# Altium PCB LCD-Controller.PcbDoc (part 3 of 3)
Units mm, origin at the board's own origin, x right, y up, seen from the top; angles counter-clockwise.
Board outline 100.3 x 38.1 mm, 4 copper layers (Top Layer, Signal Layer 1, Signal Layer 2, Bottom Layer), stack 0.778 mm thick; 118 components, 92 nets, 506 pads, 174 vias.
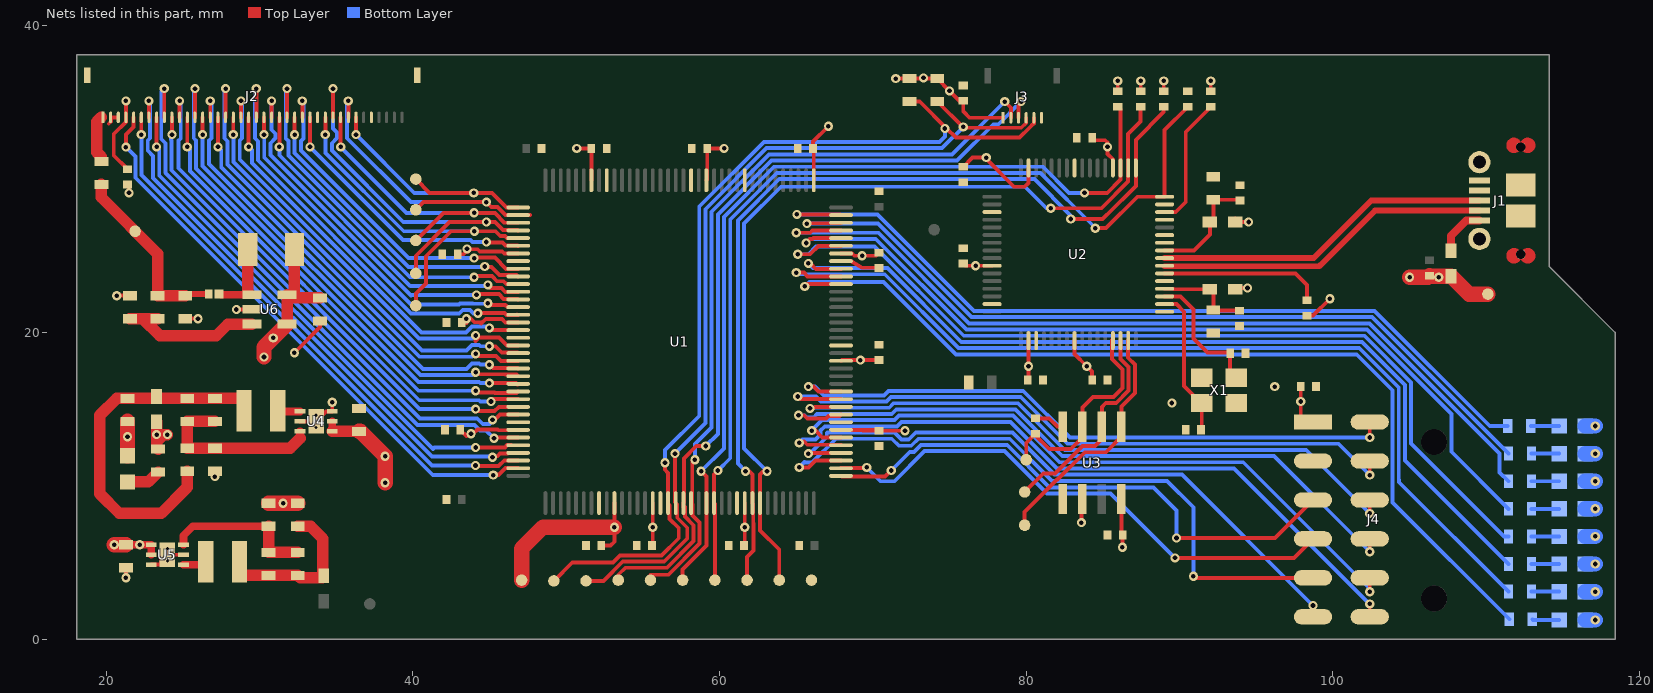
[diagram p4: the nets of this part, all layers, seen from the top]

## Via types
v1: diameter 0.6, hole 0.3, Top Layer to Bottom Layer, 170 vias
v2: diameter 0.5, hole 0.2, Top Layer to Bottom Layer, 4 vias

## Nets (pads, with @x,y where several pads share a name; then routed paths per layer and width w, separated by ;. In a path a pad name is that pad's centre, name@x,y a point inside that pad or via, vN(x,y) a via of type N, cw(c..) or ccw(c..) an arc to the next point about the centre after c; other vN are vias at no path point) (continued)
3V3: 3V3.1 C2.1 C6.1 C7.1 C8.1 C9.1 C10.1 C15.1 C16.1 C21.1 C22.1 C23.1 C24.1 C25.1 C26.1 C27.1 C28.1 C29.1 C30.1 C31.1 C32.1 C41.2 FB2.1 FB3.1 FB4.2 J2.4 J3.1 J4.1 R1.2 R2.2 R3.2 R6.2 R17.2 R18.2 R19.2 U1.7 U1.16 U1.30 U1.37 U1.51 U1.66 U1.79 U1.88 U1.102 U1.118 U1.123 U1.135 U2.20 U2.31 U2.42 U2.50 U2.56 U3.6 U3.8 | length 97.2
  Top Layer w0.25: v1(21.3,35.1) J2.4@21.3,34.025 21.3,33.72 20.5,32.92 20.5,31.55 C15.1@21.4,30.65 ; C30.1@42.927,25.1 43.3,25.1 43.479,25.279 43.616,25.279 43.762,25.425 44.238,25.425 44.384,25.279 45.834,25.279 45.963,25.15 U1.79@46.875,25.15 ; C32.1@43.1,13.65 43.504,13.246 43.758,13.5 43.8,13.458 v1(43.8,13.4) 43.939,13.4 44.214,13.675 45.538,13.675 45.588,13.625 46.85,13.625 U1.102@46.875,13.65 ; C31.1@43.3,20.8 43.5,20.6 v1(43.5,20.9) 43.781,20.9 44.01,20.671 44.366,20.671 44.462,20.575 44.762,20.875 45.809,20.875 46.034,20.65 U1.88@46.875,20.65 ; v1(50.7,32) C29.1@51.65,32 U1.66@51.65,29.925 ; C21.1@52.3,6.1 52.9,6.1 53.15,6.35 v1(53.15,7.3) U1.118@53.15,8.875 ; U1.123@55.65,8.875 v1(55.65,7.3) 55.65,6.15 C22.1@55.7,6.1 ; U1.51@59.15,29.925 59.2,29.975 C28.1@59.2,32 v1(60.3,32) ; C23.1@61.6,6.1 61.65,6.15 v1(61.65,7.3) U1.135@61.65,8.875 ; U1.37@66.15,29.925 66.15,31.95 C27.1@66.1,32 66.1,32.448 v1(67.1,33.448) ; U1.7@67.925,13.65 69.3,13.65 ; U1.16@67.925,18.15 67.975,18.2 v1(69.188,18.2) C25.1@70.4,18.2 ; U1.30@67.925,25.15 68.641,25.15 68.791,25 v1(69.3,25) 70.2,25 C26.1@70.4,25.2 ; C24.1@70.4,13.6 70.35,13.65 69.3,13.65 ; v1@71.45,36.6 v1(71.5,36.55) R18.2@72.4,36.55 R17.2@74.203,36.55 v1(75,35.753) 75.653,35.1 C16.1@75.9,35.1 75.9,34.4 76.3,34 J3.1@78.5,34 ; v1(72.1,13.594) 69.356,13.594 69.3,13.65 ; C8.1@75.9,24.5 76.05,24.35 v1(76.7,24.35) U2.42@77.775,24.35 ; C7.1@75.9,30.8 76.5,31.4 v1(77.4,31.4) 77.4,31.3 79.2,29.5 79.9,29.5 80.15,29.75 U2.31@80.15,30.725 ; C9.1@80.1,16.9 80.15,16.95 v1(80.15,17.8) U2.50@80.15,19.475 ; U2.56@83.15,19.475 83.15,18.6 v1(83.95,17.8) 84.3,17.45 C10.1@84.3,16.9 ; v1(83.6,7.6) 83.6,9.138 U3.6@83.665,9.138 ; C6.1@84.3,32.7 84.464,32.536 85.157,32.536 85.3,32.393 v1(85.3,32.1) 85.3,31.641 85.65,31.291 U2.20@85.65,30.725 ; R3.2@85.965,35.719 v1(85.965,36.4) ; U3.8@86.205,9.138 86.205,6.895 C2.1@86.3,6.8 86.274,6.8 v1(86.274,6) ; R2.2@87.465,35.719 v1(87.465,36.4) ; R1.2@88.965,35.719 v1(88.965,36.4) ; R6.2@92.038,35.719 v1(92.038,36.4) ; FB2.1@93.625,22.82 93.705,22.9 v1(94.43,22.9) v1@94.5,22.9 ; FB3.1@93.625,27.2 93.625,27.425 93.85,27.2 v1(94.5,27.2) ; C41.2@97.9,16.47 97.9,14.16 J4.1@98.7,14.16
  Top Layer w0.75: FB4.2@23.3,14.175 v1(23.3,13.337) 23.3,12.9 ; R19.2@23.4,12.4 23.3,12.5 23.3,12.9 ; v1(24.004,13.337) 23.737,13.337 23.3,12.9
  Top Layer w1: 3V3.1@47.1,3.85 47.1,5.9 48.5,7.3 v1(53.15,7.3)
  other v1: 97.9,15.5 43.54,25.451 73.3,36.6
5V_USB: 5V.1 C1.1 C34.1 C37.1 C40.1 FB1.2 L3.1 U4.4 U4.5 U5.4 U5.5 U6.4 U6.5 | length 24.7
  Top Layer w0.25: FB1.2@107.675,23.7 FB1.2@107.7,23.675
  Top Layer w0.5: C37.1@21.3,6.16 v1(22.2,6.16) U5.4@22.95,6.16 U5.5@22.95,5.51 ; U4.4@34.75,13.55 U4.5@34.75,14.2
  Top Layer w0.75: U6.4@31.805,20.55 U6.5@31.805,22.45 ; U6.5@32.087,22.25 32.287,22.45 L3.1@32.287,25.4 ; U6.5@32.287,22.25 C40.1@33.962,22.25 ; U4.4@34.75,13.55 C34.1@36.4,13.55
  Top Layer w1: v1(20.54,6.16) C37.1@21.3,6.16 ; v1(30.3,18.4) 30.3,19.045 v1(30.9,19.645) U6.4@31.805,20.55 ; C34.1@36.5,13.55 36.581,13.55 v1(38.2,11.931) v1(38.2,10.2) ; v1(105,23.6) 106.2,23.6 C1.1@106.3,23.7 106.325,23.675 FB1.2@107.7,23.675 108.875,22.5 5V.1@110.1,22.5
  other v1: 106.9,23.6
16V: 16V.1 C39.1 D1.1 R8.2 R25.2 | length 12
  Top Layer w0.4: C39.1@25.262,22.5 D1.1@26.697,22.5
  Top Layer w0.75: R8.2@19.7,29.65 19.7,28.8 23.362,25.138 R25.2@23.362,22.4 C39.1@25.162,22.4
B0: J2.21 U1.87 | length 28.1
  Top Layer w0.15: U1.87@46.8,21.225 U1.87@46.875,21.15
  Top Layer w0.254: J2.21@29.8,34.025 v1(29.8,35.9) ; v1(44.248,21.246) v1@44.248,21.289 ; v1@44.27,21.267 44.27,21.277 45.976,21.277 46.103,21.15 U1.87@46.875,21.15
  Bottom Layer w0.254: v1(29.8,35.9) 29.723,35.823 29.723,32.661 29.915,32.469 29.915,31.228 39.897,21.246 43.03,21.246 43.261,21.477 43.739,21.477 43.97,21.246 v1(44.248,21.246)
B1: J2.22 U1.86 | length 23
  Top Layer w0.254: v1(30.3,32.9) J2.22@30.3,34.025 ; v1@45.118,21.781 46.025,21.781 46.058,21.748 46.076,21.748 46.174,21.65 U1.86@46.875,21.65
  Bottom Layer w0.254: v1(30.3,32.9) 30.319,32.881 30.319,31.396 39.892,21.823 43.036,21.823 43.094,21.881 43.906,21.881 43.918,21.869 44.869,21.869 v1(44.9,21.9)
B2: J2.23 U1.85 | length 25.3
  Top Layer w0.254: J2.23@30.8,34.025 v1(30.8,35.1) ; v1(44.157,22.446) 44.033,22.446 43.983,22.496 45.613,22.496 45.924,22.185 46.84,22.185 U1.85@46.875,22.15
  Bottom Layer w0.254: v1(30.8,35.1) 30.8,33.216 31.061,32.955 31.061,32.677 30.723,32.339 30.723,31.563 39.886,22.4 39.932,22.446 v1(44.157,22.446)
B3: J2.24 U1.84 | length 21.8
  Top Layer w0.254: v1(31.3,32.1) J2.24@31.3,34.025 ; v1(44.9,23.1) 44.9,23.073 45.073,22.9 45.78,22.9 46.03,22.65 U1.84@46.875,22.65
  Bottom Layer w0.254: v1(31.3,32.1) 31.3,31.557 39.834,23.023 44.239,23.023 44.293,23.023 44.823,23.023 v1(44.9,23.1)
B4: J2.25 U1.83 | length 24.9
  Top Layer w0.254: J2.25@31.8,34.025 v1(31.8,35.9) ; v1(44,23.6) 44,23.654 44.023,23.677 45.165,23.677 45.5,23.342 45.909,23.342 46.101,23.15 U1.83@46.875,23.15 U1.83@46.856,23.169
  Bottom Layer w0.254: v1(31.8,35.9) 31.723,35.823 31.723,32.646 31.896,32.473 31.896,31.533 39.829,23.6 v1(44,23.6)
B5: J2.26 U1.82 | length 20.2
  Top Layer w0.254: v1(32.3,32.885) J2.26@32.3,34.025 ; v1(44.7,24.3) 44.8,24.2 v1@44.9,24.3 ; v1@44.978,24.269 45.144,24.269 45.667,23.746 46.779,23.746 U1.82@46.875,23.65
  Bottom Layer w0.254: v1(32.3,32.885) 32.3,31.7 39.727,24.273 44.673,24.273 v1(44.7,24.3)
B6: J2.27 U1.81 | length 21.8
  Top Layer w0.254: J2.27@32.8,34.025 v1(32.8,35.1) ; v1(44,24.85) 44.027,24.877 45.362,24.877 46.089,24.15 U1.81@46.875,24.15
  Bottom Layer w0.254: v1(32.8,35.1) 32.877,35.023 32.877,32.646 32.723,32.492 32.723,31.861 39.734,24.85 v1(44,24.85)
B7: J2.28 U1.78 | length 18.2
  Top Layer w0.254: v1(33.3,32.1) J2.28@33.3,34.025 ; v1(44.8,25.9) 44.823,25.877 45.858,25.877 46.054,25.681 46.844,25.681 U1.78@46.875,25.65
  Bottom Layer w0.254: v1(33.3,32.1) 39.372,26.028 43.779,26.028 43.907,25.9 v1(44.8,25.9)
EECLK: EECLK.1 U2.62 U3.2 | length 14.2
  Top Layer w0.254: EECLK.1@79.9,9.6 81.109,10.809 81.882,10.809 83.667,12.595 84.488,12.595 84.935,13.042 U3.2@84.935,13.862 84.935,15.15 85.185,15.4 85.871,15.4 86.678,16.207 86.678,17.75 86.15,18.279 U2.62@86.15,19.475
EECS: EECS.1 U2.63 U3.1 | length 16
  Top Layer w0.254: EECS.1@79.9,7.431 79.9,8.305 82.001,10.405 82.05,10.405 83.835,12.191 85.191,12.191 86.205,13.205 U3.1@86.205,13.862 86.205,15.162 87.082,16.04 87.082,17.918 86.65,18.35 U2.63@86.65,19.475
EEDATA: EEDATA.1 R5.1 U2.61 U3.3 | length 14.3
  Top Layer w0.254: EEDATA.1@80,11.7 80,12.8 R5.1@80.55,13.35 ; R5.1@80.6,13.4 R5.1@80.55,13.35 ; U2.61@85.6,19.496 85.6,18.257 86.185,17.673 86.274,17.583 86.274,16.374 85.704,15.804 84.354,15.804 83.665,15.115 U3.3@83.665,13.862 83.665,13.164 82.901,12.4 81.5,12.4 R5.1@80.55,13.35
G0: J2.13 U1.97 | length 34.3
  Top Layer w0.254: J2.13@25.8,34.025 v1(25.8,35.9) ; v1(44.1,16.2) 44.223,16.077 45.339,16.077 45.362,16.054 46.779,16.054 U1.97@46.875,16.15
  Bottom Layer w0.254: v1(25.8,35.9) 25.723,35.823 25.723,32.661 25.876,32.508 25.876,32.34 25.877,32.339 25.877,30.696 40.373,16.2 v1(44.1,16.2)
G1: J2.14 U1.96 | length 29.7
  Top Layer w0.254: v1(26.3,32.9) J2.14@26.3,34.025 ; v1(45,16.7) 46.725,16.7 46.825,16.6 U1.96@46.875,16.65
  Bottom Layer w0.254: v1(26.3,32.9) 26.28,32.88 26.28,32.507 26.281,32.506 26.281,30.863 40.367,16.777 44.339,16.777 44.416,16.7 v1(45,16.7)
G2: J2.15 U1.95 | length 31.3
  Top Layer w0.254: J2.15@26.8,34.025 v1(26.8,35.1) ; v1(44.1,17.4) 44.223,17.277 46.03,17.277 46.058,17.248 46.706,17.248 46.708,17.246 46.779,17.246 U1.95@46.875,17.15
  Bottom Layer w0.254: v1(26.8,35.1) 26.877,35.023 26.877,32.661 26.723,32.507 26.723,30.992 40.496,17.219 43.881,17.219 44.062,17.4 v1(44.1,17.4)
G3: J2.16 U1.94 | length 28.4
  Top Layer w0.254: v1(27.3,32.1) J2.16@27.3,34.025 ; v1@45,17.9 45.219,17.681 46.844,17.681 U1.94@46.875,17.65
  Bottom Layer w0.254: v1(27.3,32.1) 27.511,31.889 27.511,30.776 40.664,17.623 43.507,17.623 43.861,17.977 44.339,17.977 44.416,17.9 v1(45,17.9)
G4: J2.17 U1.93 | length 31.4
  Top Layer w0.254: J2.17@27.8,34.025 v1(27.8,35.9) ; v1(44.1,18.6) 44.223,18.477 45.439,18.477 45.766,18.15 U1.93@46.875,18.15
  Bottom Layer w0.254: v1(27.8,35.9) 27.723,35.823 27.723,32.661 27.915,32.469 27.915,30.943 40.439,18.419 43.881,18.419 44.062,18.6 v1(44.1,18.6)
G5: J2.18 U1.92 | length 26.9
  Top Layer w0.254: v1(28.3,32.9) J2.18@28.3,34.025 ; v1(45,19.1) 45.387,19.1 45.806,18.681 46.844,18.681 U1.92@46.875,18.65
  Bottom Layer w0.254: v1(28.3,32.9) 28.319,32.881 28.319,31.11 40.606,18.823 43.507,18.823 43.861,19.177 44.339,19.177 44.416,19.1 v1(45,19.1)
G6: J2.19 U1.91 | length 28.8
  Top Layer w0.254: J2.19@28.8,34.025 v1(28.8,35.1) ; v1@44.2,19.55 44.1,19.45 v1(44.1,19.8) 44.223,19.677 45.63,19.677 46.156,19.15 U1.91@46.875,19.15
  Bottom Layer w0.254: v1(28.8,35.1) 28.877,35.023 28.877,32.661 28.723,32.507 28.723,31.278 40.407,19.594 43.906,19.594 44.1,19.788 v1(44.1,19.8)
G7: J2.20 U1.89 | length 25.2
  Top Layer w0.254: v1(29.3,32.1) J2.20@29.3,34.025 ; v1(45,20.3) 45.15,20.15 U1.89@46.875,20.15
  Bottom Layer w0.254: v1(29.3,32.1) 29.511,31.889 29.511,31.061 40.574,19.998 43.482,19.998 43.861,20.377 44.923,20.377 v1(45,20.3)
GND: C2.2 C3.2 C4.2 C5.2 C6.2 C7.2 C8.2 C9.2 C10.2 C11.2 C12.2 C13.2 C14.2 C15.2 C16.2 C17.2 C18.2 C19.2 C20.2 C21.2 C22.2 C23.2 C24.2 C25.2 C26.2 C27.2 C28.2 C29.2 C30.2 C31.2 C32.2 C34.2 C35.2 C37.2 C38.2 C39.2 C40.2 C41.1 DS1.2 DS2.2 DS3.2 DS4.2 DS5.2 DS6.2 DS7.2 DS8.2 DS9.2 GND.1 J1.4 J1.5 J1.6 J1.7 J1.8 J1.9 J1.10 J1.11 J2.2 J2.3 J2.7@40.294,36.768 J2.8@18.781,36.768 J2.29 J2.36 J3.6 J4.2 R4.1 R7.1 R22.1 R24.1 R26.1 U1.8 U1.18 U1.29 U1.46 U1.53 U1.64 U1.80 U1.90 U1.101 U1.116 U1.124 U1.134 U2.1 U2.5 U2.10 U2.11 U2.13 U2.15 U2.25 U2.35 U2.47 U2.51 U3.5 U4.2 U4.6 U4.7 U5.2 U5.6 U5.7 U6.2 X1.2 X1.4 | length 27.3
  Top Layer w0.25: 20.175,33.606 20.325,33.756 20.325,34.025 J2.3@20.8,34.025 ; v1(20.7,22.4) R26.1@21.562,22.4 ; v1(21.3,4) C37.2@21.3,4.66 ; C15.2@21.4,29.65 21.5,29.55 v1(21.5,29.1) ; U5.6@22.95,4.86 23.575,4.86 23.575,5.51 U5.7@24,5.51 U5.2@25.05,5.51 ; C39.2@25.162,20.9 v1(26,20.9) ; v1(28.5,21.5) U6.2@29.519,21.5 ; v1(32.287,18.681) 33.962,20.356 C40.2@33.962,20.75 ; U4.2@32.65,14.2 U4.7@33.7,14.2 34.35,14.85 U4.6@34.75,14.85 v1(34.75,15.45) ; U1.29@67.925,24.65 68.597,24.65 69.3,24.224 C26.2@70.4,24.2 ; R7.1@98.3,21.1 98.7,21.1 v1(99.8,22.2)
  Top Layer w1: DS9.2@21.4,11.953 C35.2@21.4,14.2 ; R24.1@30.6,8.86 v1(31.55,8.86) C38.2@32.5,8.86
  Bottom Layer w1: DS8.2@116.45,1.254 v1(117.1,1.254) ; DS7.2@116.45,3.1 v1(117.1,3.1) ; DS6.2@116.45,4.9 v1(117.1,4.9) ; DS5.2@116.45,6.7 v1(117.1,6.7) ; DS4.2@116.45,8.5 v1(117.1,8.5) ; DS3.2@116.45,10.3 v1(117.1,10.3) ; DS2.2@116.45,12.1 v1(117.1,12.1) ; DS1.2@116.45,13.9 v1(117.1,13.9)
  other v1: 27.1,10.6 21.4,13.2 89.5,15.4 96.2,16.473
  other v2: 24,5.11 24,5.91 33.7,13.8 33.7,14.6
HSYNC: HSYNC.1 J2.32 U1.75 | length 20.1
  Top Layer w0.254: v1(35.3,32.1) J2.32@35.3,34.025 ; HSYNC.1@40.2,26 42,27.8 v1(44,27.8) 44.023,27.777 45.353,27.777 45.98,27.15 U1.75@46.875,27.15
  Bottom Layer w0.254: v1(35.3,32.1) 39.6,27.8 v1(44,27.8)
I2C_SCL: J3.4 R17.1 SCL.1 U1.126 | length 56.4
  Top Layer w0.254: SCL.1@51.3,3.8 52.428,3.8 53.692,5.064 56.399,5.064 57.9,6.565 57.9,7.264 57.246,7.918 57.246,8.779 U1.126@57.15,8.875 57.096,8.929 57.096,11.388 57.1,11.392 v1(57.1,12.1) ; R17.1@74.203,35.05 75.9,33.353 v1(75.9,33.4) 75.952,33.348 79.678,33.348 80,33.67 J3.4@80,34
  Bottom Layer w0.254: v1(57.1,12.1) 59.084,14.084 59.084,28.037 63.063,32.016 74.516,32.016 v1(75.9,33.4)
I2C_SDA: J3.5 R18.1 SDA.1 U1.125 | length 60.6
  Top Layer w0.254: SDA.1@49.2,3.8 50.4,5 53.057,5 53.525,5.468 56.232,5.468 57.346,6.582 57.346,7.246 56.748,7.844 56.748,8.706 56.692,8.762 56.692,8.833 U1.125@56.65,8.875 56.65,10.842 56.446,11.046 v1(56.446,11.5) ; R18.1@72.4,35.05 73.061,35.05 v1@74.811,33.3 ; v1(74.7,33.3) v1@74.811,33.3 ; J3.5@80.5,34 80.5,33.633 80.384,33.517 80.384,33.511 79.837,32.964 79.831,32.964 79.567,32.7 75.411,32.7 v1@74.811,33.3
  Bottom Layer w0.254: v1(56.446,11.5) 56.446,12.33 58.68,14.564 58.68,28.204 62.896,32.42 74.349,32.42 74.7,32.771 v1(74.7,33.3)
LCD_CLK: DCLK.1 J2.30 U1.77 | length 24.5
  Top Layer w0.254: v1(34.3,32.9) J2.30@34.3,34.025 ; DCLK.1@40.2,21.748 40.2,22.546 40.852,23.198 40.852,24.967 42.485,26.6 v1(44.023,26.6) 45.387,26.6 45.706,26.281 46.026,26.281 46.156,26.15 U1.77@46.875,26.15
  Bottom Layer w0.254: v1(34.3,32.9) 34.3,31.713 39.413,26.6 v1(44.023,26.6)
LCD_DE: DDE.1 J2.34 U1.73 | length 17.8
  Top Layer w0.254: v1(36.3,32.9) J2.34@36.3,34.025 ; DDE.1@40.2,30 41.1,29.1 v1(43.979,29.1) 45.173,29.1 46.123,28.15 U1.73@46.875,28.15
  Bottom Layer w0.254: v1(36.3,32.9) 40.1,29.1 v1(43.979,29.1)
LCD_DISP: DISP.1 J2.31 U1.76 | length 27.1
  Top Layer w0.254: J2.31@34.8,34.025 v1(34.8,35.9) ; DISP.1@40.2,23.85 40.2,25 42.4,27.2 v1(44.8,27.2) 45.359,27.2 45.874,26.685 46.84,26.685 U1.76@46.875,26.65
  Bottom Layer w0.254: v1(34.8,35.9) 34.8,33.3 35.061,33.039 35.061,32.677 34.723,32.339 34.723,31.861 39.384,27.2 v1(44.8,27.2)
LCD_INT: DINT.1 J3.3 U1.127 | length 52.7
  Top Layer w0.254: DINT.1@53.4,4.2 53.86,4.66 56.567,4.66 58.304,6.397 58.304,7.431 57.748,7.987 57.748,8.63 57.747,8.631 57.65,8.631 U1.127@57.65,8.875 57.677,8.902 57.677,11.793 58.484,12.6 v1(59.1,12.6) ; J3.3@79.5,34 79.5,34.883 v1(79.667,35.05)
  Bottom Layer w0.254: v1(59.1,12.6) 59.892,13.392 59.892,27.702 63.398,31.208 75.492,31.208 77.861,33.577 78.194,33.577 v1(79.667,35.05)
LCD_RST: DRST.1 J3.2 U1.128 | length 49.8
  Top Layer w0.254: DRST.1@55.5,4.2 56.678,4.2 58.708,6.23 58.708,7.598 58.248,8.058 58.248,8.777 U1.128@58.15,8.875 58.223,8.948 58.223,11.623 58.3,11.7 v1(58.4,11.7) ; v1(78.6,35.05) 79,34.65 J3.2@79,34
  Bottom Layer w0.254: v1(58.4,11.7) 58.4,12.716 59.488,13.804 59.488,27.869 63.231,31.612 75.162,31.612 v1(78.6,35.05)
NetC3_1: C3.1 U2.2 X1.1 | length 9.7
  Top Layer w0.254: U2.2@89.025,21.85 89.8,21.85 90.3,21.35 90.3,16.508 91.408,15.4 X1.1@91.444,15.4 91.444,13.694 C3.1@91.4,13.65
NetC4_1: C4.1 U2.3 X1.3 | length 8.9
  Top Layer w0.254: U2.3@89.025,22.35 90.05,22.35 90.9,21.5 90.9,19.6 91.808,18.692 93.3,18.692 93.3,17.051 X1.3@93.705,17.051
NetC11_1: C11.1 C12.1 FB3.2 U2.9 | length 7.5
  Top Layer w0.254: U2.9@89.025,25.35 90.95,25.35 91.975,26.375 FB3.2@91.975,27.2 92.2,27.425 C11.1@92.2,28.65 93.885,28.65 C12.1@93.935,28.6
NetC13_1: C13.1 C14.1 FB2.2 U2.4 | length 6.1
  Top Layer w0.254: U2.4@89.025,22.85 89.594,22.85 89.624,22.82 FB2.2@91.975,22.82 92.2,22.595 C13.1@92.2,21.47 92.25,21.42 C14.1@93.9,21.42
NetC33_2: C33.2 R20.1 R21.1 R22.2 U4.3 | length 11.6
  Top Layer w0.5: 32.65,13.1 U4.3@32.65,13.55
  Top Layer w0.75: R20.1@27.1,14.2 R21.1@25.3,14.2 C33.2@25.3,12.45 R22.2@27.1,12.45 32,12.45 32.65,13.1
NetC36_2: C36.2 R23.1 R24.2 U5.3 | length 10
  Top Layer w0.5: U5.3@25.05,6.16 25.05,6.75 25.66,7.36 R24.2@30.6,7.36
  Top Layer w0.75: R24.2@30.6,7.36 R23.1@30.6,5.66 C36.2@32.5,5.66
NetD1_2: D1.2 L3.2 U6.1 | length 4.7
  Top Layer w0.5: D1.2@27.507,22.45 U6.1@29.519,22.45
  Top Layer w0.75: 29.237,22.732 L3.2@29.237,25.4
NetDS1_1: DS1.1 R9.1 | length 1.8
  Bottom Layer w0.254: R9.1@112.9,13.9 DS1.1@114.75,13.9
NetDS2_1: DS2.1 R10.1 | length 1.8
  Bottom Layer w0.254: R10.1@112.95,12.1 DS2.1@114.75,12.1
NetDS3_1: DS3.1 R11.1 | length 1.8
  Bottom Layer w0.254: R11.1@112.95,10.3 DS3.1@114.75,10.3
NetDS4_1: DS4.1 R12.1 | length 1.8
  Bottom Layer w0.254: R12.1@112.95,8.5 DS4.1@114.75,8.5
NetDS5_1: DS5.1 R13.1 | length 1.8
  Bottom Layer w0.254: R13.1@112.95,6.7 DS5.1@114.75,6.7
NetDS6_1: DS6.1 R14.1 | length 1.8
  Bottom Layer w0.254: R14.1@112.95,4.9 DS6.1@114.75,4.9
NetDS7_1: DS7.1 R15.1 | length 1.8
  Bottom Layer w0.254: R15.1@112.95,3.1 DS7.1@114.75,3.1
NetDS8_1: DS8.1 R16.1 | length 1.8
  Bottom Layer w0.254: R16.1@113,1.3 113.046,1.254 DS8.1@114.75,1.254
NetDS9_1: DS9.1 R19.1 | length 2.3
  Top Layer w0.75: DS9.1@21.4,10.253 22.753,10.253 R19.1@23.4,10.9
NetFB1_1: FB1.1 J1.1 | length 3.2
  Top Layer w0.5: FB1.1@107.7,25.325 107.7,26.3 108.7,27.3 J1.1@109.55,27.3
NetJ2_1: J2.1 R8.1 | length 3.1
  Top Layer w0.254: R8.1@19.7,31.15 19.7,31.45
  Top Layer w0.75: 19.675,34.025 19.4,33.75 19.4,31.75 19.7,31.45
NetJ4_3: J4.3 U1.1 | length 36.2
  Top Layer w0.254: U1.1@67.925,10.65 67.975,10.6 70.8,10.6 v1(71.2,11) ; v1(89.8,6.6) 96.22,6.6 J4.3@98.7,9.08
  Bottom Layer w0.254: v1(71.2,11) 72.409,12.209 72.674,12.209 73.132,12.668 78.761,12.668 81.529,9.9 88.3,9.9 89.8,8.4 v1(89.8,6.6)
NetJ4_4: J4.4@98.7,6.54 U1.2 | length 35.4
  Top Layer w0.254: U1.2@67.925,11.15 69.55,11.15 v1(69.6,11.2) ; v1(89.7,5.3) 97.46,5.3 J4.4@98.7,6.54
  Bottom Layer w0.254: v1(69.6,11.2) 70.5,10.3 71.4,10.3 73.364,12.264 78.594,12.264 81.362,9.496 85.504,9.496 v1(89.7,5.3)
NetJ4_5: J4.5 U1.3 | length 44.5
  Top Layer w0.254: v1(65.2,11.2) 65.8,11.2 66.25,11.65 U1.3@67.925,11.65 ; v1(90.9,4.1) 90.9,4 J4.5@98.7,4 J4.5@98.4,4.3
  Bottom Layer w0.254: v1(65.2,11.2) 65.542,11.542 65.561,11.523 66.039,11.523 67.588,13.072 71.235,13.072 71.694,12.613 72.506,12.613 72.965,13.072 78.929,13.072 81.679,10.322 89.178,10.322 90.9,8.6 v1(90.9,4.1)
NetJ4_6: J4.6 U1.4 | length 41.8
  Top Layer w0.254: v1(65.8,12.1) 65.7,12.1 65.65,12.15 U1.4@67.925,12.15 ; J4.6@98.7,1.46 v1(98.7,2.2)
  Bottom Layer w0.254: v1(65.8,12.1) 65.899,12.1 66.993,13.194 66.993,13.438 67.031,13.476 71.402,13.476 71.861,13.017 72.339,13.017 72.798,13.476 79.096,13.476 81.846,10.726 90.158,10.726 98.684,2.2 v1(98.7,2.2)
NetJ4_7: J4.7 U1.5 | length 46.5
  Top Layer w0.254: v1(65.2,12.8) 65.4,12.8 65.5,12.9 65.723,12.677 67.898,12.677 U1.5@67.925,12.65 ; J4.7@102.4,1.46 v1(102.4,2.3)
  Bottom Layer w0.254: v1(65.2,12.8) 65.423,13.023 66.251,13.023 66.589,13.361 66.589,13.606 66.863,13.88 71.57,13.88 71.861,14.171 78.972,14.171 82.013,11.13 93.554,11.13 102.384,2.3 v1(102.4,2.3)
NetJ4_8: J4.8 U1.6 | length 44.7
  Top Layer w0.254: v1(66.012,13.6) 66.25,13.6 66.7,13.15 U1.6@67.925,13.15 ; v1(102.4,3.1) J4.8@102.4,4
  Bottom Layer w0.254: v1(66.012,13.6) 66.696,14.284 71.402,14.284 71.694,14.575 79.139,14.575 82.181,11.534 94.153,11.534 102.4,3.287 v1(102.4,3.1)
NetJ4_9: J4.9 U1.9 | length 45.2
  Top Layer w0.254: v1(65.15,14.605) 65.52,14.605 65.725,14.4 66.956,14.4 67.108,14.552 67.827,14.552 U1.9@67.925,14.65 ; v1(102.4,5.7) J4.9@102.4,6.54
  Bottom Layer w0.254: v1(65.15,14.605) 65.535,14.605 65.667,14.473 66.145,14.473 66.36,14.688 71.235,14.688 71.526,14.979 79.306,14.979 82.348,11.938 96.162,11.938 v1(102.4,5.7)
NetJ4_10: J4.10 U1.10 | length 42.6
  Top Layer w0.254: v1(65.906,15.05) 66.012,15.05 66.066,14.996 66.22,15.15 U1.10@67.925,15.15 ; v1(102.4,8.2) J4.10@102.4,9.08
  Bottom Layer w0.254: v1(65.906,15.05) 65.948,15.092 71.067,15.092 71.359,15.383 79.474,15.383 82.515,12.342 98.258,12.342 v1(102.4,8.2)
NetJ4_11: J4.11 U1.11 | length 43.5
  Top Layer w0.254: v1(65.1,15.825) 65.275,15.65 U1.11@67.925,15.65 ; v1(102.4,10.7) J4.11@102.4,11.62
  Bottom Layer w0.254: v1(65.1,15.825) 66.304,15.825 66.633,15.496 70.9,15.496 71.192,15.787 79.641,15.787 82.683,12.746 100.354,12.746 v1(102.4,10.7)
NetJ4_12: J4.12 U1.12 | length 41.5
  Top Layer w0.254: v1(65.8,16.473) 66.127,16.473 66.45,16.15 U1.12@67.925,16.15 ; v1(102.4,13.15) J4.12@102.4,14.16
  Bottom Layer w0.254: v1(65.8,16.473) 66.227,16.473 66.8,15.9 70.733,15.9 71.024,16.191 79.809,16.191 82.85,13.15 v1(102.4,13.15)
NetL1_1: L1.1 U4.1 | length 1.5
  Top Layer w0.5: L1.1@31.25,14.85 U4.1@32.65,14.85
  Top Layer w0.75: L1.1@31.2,14.9 L1.1@31.25,14.85
NetL2_1: L2.1 U5.1 | length 1.5
  Top Layer w0.5: U5.1@25.05,4.86 L2.1@26.307,4.86
  Top Layer w0.75: L2.1@26.307,4.86 L2.1@26.5,5.053
NetR5_2: R5.2 U3.4 | length 2
  Top Layer w0.254: R5.2@80.6,14.4 81.5,14.4 82.038,13.862 U3.4@82.395,13.862
NetR6_1: R6.1 U2.14 | length 8.5
  Top Layer w0.254: U2.14@89.025,27.85 89.75,27.85 90.4,28.5 90.4,33.081 R6.1@92.038,34.719
NetR7_2: R7.2 U2.6 | length 10.6
  Top Layer w0.254: U2.6@89.025,23.85 97.55,23.85 98.3,23.1 R7.2@98.3,22.1
NetR9_2: R9.2 U1.35 | length 55
  Top Layer w0.254: v1(65.05,27.7) 67.875,27.7 U1.35@67.925,27.65
  Bottom Layer w0.254: v1(65.05,27.7) 65.054,27.704 70.296,27.704 76.6,21.4 102.721,21.4 110.221,13.9 R9.2@111.4,13.9
NetR10_2: R10.2 U1.34 | length 54.2
  Top Layer w0.254: v1@65.723,27.1 v1(65.7,27.1) 65.723,27.123 67.898,27.123 U1.34@67.925,27.15
  Bottom Layer w0.254: v1(65.7,27.1) 70.329,27.1 76.433,20.996 102.554,20.996 R10.2@111.45,12.1
NetR11_2: R11.2 U1.33 | length 56.9
  Top Layer w0.254: v1(65,26.5) 65.916,26.5 66.066,26.65 U1.33@67.925,26.65
  Bottom Layer w0.254: v1(65,26.5) 70.357,26.5 76.265,20.592 102.387,20.592 110.873,12.106 110.873,10.877 R11.2@111.45,10.3
NetR12_2: R12.2 U1.32 | length 57
  Top Layer w0.254: v1(65.65,25.834) 65.912,26.096 66.083,26.096 66.137,26.15 U1.32@67.925,26.15
  Bottom Layer w0.254: v1(65.65,25.834) 65.912,26.096 70.19,26.096 76.098,20.188 102.219,20.188 107.727,14.68 107.727,12.223 R12.2@111.45,8.5
NetR13_2: R13.2 U1.31 | length 59.8
  Top Layer w0.254: v1(65.1,25.1) 65.9,25.1 66.45,25.65 U1.31@67.925,25.65
  Bottom Layer w0.254: v1(65.1,25.1) 65.8,25.1 66.3,25.6 70.115,25.6 75.931,19.784 102.052,19.784 105.1,16.736 105.1,12.766 111.166,6.7 R13.2@111.45,6.7
NetR14_2: R14.2 U1.28 | length 58.9
  Top Layer w0.254: v1(65.8,24.5) 65.925,24.5 66.275,24.15 U1.28@67.925,24.15
  Bottom Layer w0.254: v1(65.8,24.5) 66.1,24.2 70.943,24.2 75.763,19.38 101.885,19.38 104.696,16.569 104.696,11.654 R14.2@111.45,4.9
NetR15_2: R15.2 U1.27 | length 61.7
  Top Layer w0.254: v1(65,23.9) 65.5,23.9 65.75,23.65 U1.27@67.925,23.65
  Bottom Layer w0.254: v1(65,23.9) 65.104,23.796 70.776,23.796 75.596,18.976 101.717,18.976 104.292,16.401 104.292,10.408 104.317,10.383 104.317,10.233 R15.2@111.45,3.1
NetR16_2: R16.2 U1.26 | length 61.9
  Top Layer w0.254: v1(65.561,23) 65.711,23.15 U1.26@67.925,23.15
  Bottom Layer w0.254: v1(65.561,23) 65.861,23.3 70.701,23.3 75.429,18.572 101.55,18.572 103.888,16.234 103.888,8.912 R16.2@111.5,1.3
NetR25_1: R25.1 R26.2 U6.3 | length 9.7
  Top Layer w0.75: R26.2@21.562,20.9 22.4,20.9 ; R25.1@23.362,20.9 22.4,20.9 ; U6.3@29.519,20.55 27.95,20.55 27.2,19.8 23.5,19.8 22.4,20.9
R0: J2.5 U1.107 | length 37.6
  Top Layer w0.254: v1(21.3,32.085) 21.3,32.9 21.8,33.4 J2.5@21.8,34.025 ; v1(45.244,10.7) 45.487,10.7 45.537,10.75 45.587,10.7 46.037,11.15 U1.107@46.875,11.15
  Bottom Layer w0.254: v1(21.3,32.085) 21.915,31.47 21.915,30.087 41.302,10.7 v1(45.244,10.7)
R1: J2.6 U1.106 | length 36.3
  Top Layer w0.254: v1(22.3,32.9) J2.6@22.3,34.025 ; v1(44.092,11.323) 44.131,11.284 45.6,11.284 45.966,11.65 U1.106@46.875,11.65
  Bottom Layer w0.254: v1(22.3,32.9) 22.319,32.881 22.319,30.254 41.25,11.323 v1(44.092,11.323)
R2: J2.7@22.8,34.025 U1.105 | length 37.8
  Top Layer w0.254: J2.7@22.8,34.025 v1(22.8,35.1) ; v1(45.2,11.861) 45.27,11.931 45.53,11.931 45.695,12.096 46.174,12.096 46.228,12.15 U1.105@46.875,12.15
  Bottom Layer w0.254: v1(22.8,35.1) 22.877,35.023 22.877,32.661 22.723,32.507 22.723,31.861 23.069,31.515 23.069,30.076 41.245,11.9 45.161,11.9 v1(45.2,11.861)
R3: J2.8@23.3,34.025 U1.104 | length 34.3
  Top Layer w0.254: v1(23.3,32.1) J2.8@23.3,34.025 ; v1(44.1,12.5) 46.006,12.5 46.156,12.65 U1.104@46.4,12.65
  Bottom Layer w0.254: v1(23.3,32.1) 23.473,31.927 23.473,30.243 41.316,12.4 41.416,12.5 v1(44.1,12.5)
R4: J2.9 U1.103 | length 37.8
  Top Layer w0.254: J2.9@23.8,34.025 v1(23.8,35.9) ; v1(45.3,13.1) 45.47,13.1 45.524,13.154 46.871,13.154 U1.103@46.875,13.15
  Bottom Layer w0.254: v1(23.8,35.9) 23.6,35.7 23.6,32.616 23.877,32.339 23.877,30.41 40.31,13.977 44.039,13.977 44.397,13.619 44.781,13.619 v1(45.3,13.1)
R5: J2.10 U1.100 | length 33.3
  Top Layer w0.254: v1(24.3,32.9) J2.10@24.3,34.025 ; v1(45.2,14.3) 45.2,14.361 45.398,14.361 45.687,14.65 U1.100@46.875,14.65
  Bottom Layer w0.254: v1(24.3,32.9) 24.219,32.819 24.219,32.568 24.281,32.506 24.281,30.578 40.478,14.381 44.206,14.381 44.564,14.023 45.023,14.023 45.2,14.2 v1(45.2,14.3)
R6: J2.11 U1.99 | length 34.5
  Top Layer w0.254: J2.11@24.8,34.025 v1(24.8,35.1) ; v1(44.1,15) 44.1,14.835 44.142,14.877 45.343,14.877 45.616,15.15 U1.99@46.875,15.15
  Bottom Layer w0.254: v1(24.8,35.1) 24.877,35.023 24.877,32.661 24.723,32.507 24.723,30.707 40.43,15 v1(44.1,15)
R7: J2.12 U1.98 | length 31.3
  Top Layer w0.254: v1(25.3,32.1) J2.12@25.3,34.025 ; v1(45.1,15.5) 45.25,15.65 U1.98@46.875,15.65
  Bottom Layer w0.254: v1(25.3,32.1) 25.472,31.928 25.472,30.529 40.424,15.577 44.339,15.577 44.416,15.5 v1(45.1,15.5)
TCK: R4.2 TCK.1 U1.131 U2.16 | length 62.1
  Top Layer w0.254: TCK.1@59.7,4.2 59.7,8.825 U1.131@59.65,8.875 59.65,10.75 v1(59.9,11) ; v1(84.5,26.8) 85.2,26.8 87.25,28.85 U2.16@89.025,28.85 89.025,33.206 R4.2@90.538,34.719
  Bottom Layer w0.254: v1(59.9,11) 60.7,11.8 60.7,27.367 63.733,30.4 80.929,30.4 84.5,26.829 v1(84.5,26.8)
TDI: R1.1 TDI.1 U1.136 U2.17 | length 58.9
  Top Layer w0.254: v1(61.7,10.95) 61.95,10.95 62.15,10.75 U1.136@62.15,8.875 62.2,8.825 62.2,7.566 62.227,7.539 62.227,5.785 61.8,5.358 TDI.1@61.8,4.2 ; v1(82.9,27.4) 84.985,27.4 85.235,27.65 85.243,27.642 87.15,29.55 U2.17@87.15,30.725 87.15,32.55 88.965,34.365 R1.1@88.965,34.719
  Bottom Layer w0.254: v1(61.7,10.95) 61.2,11.45 61.2,27.296 63.9,29.996 80.532,29.996 82.9,27.628 v1(82.9,27.4)
TDO: R2.1 TDO.1 U1.137 U2.18 | length 56.9
  Top Layer w0.254: v1(63.1,10.95) 62.85,10.95 62.65,10.75 U1.137@62.65,8.875 62.65,7.1 63.9,5.85 TDO.1@63.9,4.2 ; v1(81.6,28.1) 84.9,28.1 86.65,29.85 U2.18@86.65,30.725 86.65,32.95 87.465,33.765 R2.1@87.465,34.719
  Bottom Layer w0.254: v1(63.1,10.95) 61.604,12.446 61.604,27.104 64,29.5 79.928,29.5 81.328,28.1 v1(81.6,28.1)
TMS: R3.1 TMS.1 U1.130 U2.19 | length 57.8
  Top Layer w0.254: TMS.1@57.6,4.2 57.6,4.551 59.15,6.101 U1.130@59.15,8.875 59.15,10.6 v1(58.8,10.95) ; v1(83.8,29.1) 85.285,29.1 86.15,29.965 U2.19@86.15,30.725 86.15,34.534 R3.1@85.965,34.719
  Bottom Layer w0.254: v1(58.8,10.95) 60.296,12.446 60.296,27.535 63.565,30.804 81.096,30.804 82.8,29.1 v1(83.8,29.1)
USB_N: J1.2 U2.7 | length 22
  Top Layer w0.381: U2.7@89.025,24.318 99.117,24.318 99.2,24.4 102.75,27.95 J1.2@109.55,27.95
USB_P: J1.3 U2.8 | length 22.1
  Top Layer w0.381: U2.8@89.025,24.85 97.454,24.85 97.455,24.849 98.751,24.849 102.502,28.6 J1.3@109.55,28.6
VCC_1V2: C36.1 C38.1 FB5.1 L2.2 R23.2 | length 10.9
  Top Layer w0.75: L2.2@28.7,5.053 28.7,4.16 R23.2@30.6,4.16 C36.1@32.5,4.16 32.66,4 34.1,4 34.14,4.04 34.14,6.56 33.34,7.36 C38.1@32.5,7.36
VCC_3V3: C33.1 C35.1 FB4.1 L1.2 R20.2 R21.2 | length 23.8
  Top Layer w0.75: C33.1@25.3,10.95 25.3,9.9 23.6,8.2 20.875,8.2 19.6,9.475 19.6,14.6 20.7,15.7 C35.1@21.4,15.7 23.175,15.7 FB4.1@23.3,15.825 23.425,15.7 R21.2@25.3,15.7 R20.2@27.1,15.7 28.925,15.7 29,15.625 L1.2@29,14.9
VSYNC: J2.33 U1.74 VSYNC.1 | length 22.4
  Top Layer w0.254: J2.33@35.8,34.025 v1(35.8,35.1) ; VSYNC.1@40.2,28 40.7,28.5 v1(44.8,28.5) 45.119,28.181 45.52,28.181 46.051,27.65 U1.74@46.875,27.65 47.65,27.65
  Bottom Layer w0.254: v1(35.8,35.1) 35.723,35.023 35.723,32.661 39.884,28.5 v1(44.8,28.5)
pads on no net: C1.2 J2.35 J2.37 J2.38 J2.39 J2.40 J3.7 J3.8 J4.4@106.6,2.66 J4.4@106.6,12.86 U1.13 U1.14 U1.15 U1.17 U1.19 U1.20 U1.21 U1.22 U1.23 U1.24 U1.25 U1.38 U1.39 U1.40 U1.41 U1.42 U1.43 U1.44 U1.45 U1.47 U1.48 U1.49 U1.50 U1.52 U1.54 U1.55 U1.56 U1.57 U1.58 U1.59 U1.60 U1.61 U1.62 U1.63 U1.65 U1.67 U1.68 U1.69 U1.70 U1.71 U1.109 U1.110 U1.111 U1.112 U1.113 U1.114 U1.115 U1.117 U1.119 U1.120 U1.121 U1.122 U1.129 U1.132 U1.133 U1.138 U1.139 U1.140 U1.141 U1.142 U1.143 U2.21 U2.22 U2.23 U2.24 U2.26 U2.27 U2.28 U2.29 U2.30 U2.32 U2.33 U2.34 U2.36 U2.38 U2.39 U2.40 U2.41 U2.43 U2.44 U2.45 U2.46 U2.48 U2.52 U2.53 U2.54 U2.55 U2.57 U2.58 U2.59 U2.60 U3.7
copper on no net: | length 0.8
  Top Layer w0.25: 106.3,24.7 v1(106.3,25.451)

## Polygon pours and split planes (outlines as drawn)
GND on Bottom Layer "NONET_L04_P022" (solid, shelved, pour order 22): 18.1,37.5 113.8,37.5 113.8,24 118,19.8 118,0.1 18.1,0
GND on Signal Layer 1 "GND" (solid, shelved, pour order 24): 18.1,38.1 114.1,38.1 114.1,24.3 118.3,20 118.4,0 18.1,0
5V_USB on Signal Layer 2 "3V3" (solid, shelved, pour order 28): 19.529,5.629 22.871,5.629 22.871,6.5 23.1,6.729 39.871,6.729 39.871,33.9 40.1,34.129 65.677,34.129 65.677,34.5 65.906,34.729 68.2,34.729 68.429,34.5 68.429,34.129 72.2,34.129 72.429,33.9 72.429,24.579 74.971,24.579 74.971,25.451 75.2,25.679 78.2,25.679 78.429,25.451 78.429,24.629 101,24.629 101.229,24.4 101.229,22.529 111.7,22.529 111.817,22.496 115.933,22.496 114.1,24.35 114.1,24.371 102.6,24.371 102.371,24.6 102.371,26.971 96.129,26.971 96.129,26 95.9,25.771 93,25.771 92.771,26 92.771,26.971 73.9,26.971 73.671,27.2 73.671,35.071 37.814,35.071 37.814,20.7 37.586,20.471 29.529,20.471 29.529,17.429 37.5,17.429 37.729,17.2 37.729,7.854 37.5,7.625 19.529,7.625
1V2 on Signal Layer 2 "1V2" (solid, shelved, pour order 26): 34.329,0 67.271,0 67.271,26.8 67.5,27.029 69.971,27.029 69.971,30.471 49.5,30.471 49.271,30.7 49.271,32.271 46.929,32.271 46.929,29.329 63.8,29.329 64.029,29.1 64.029,4.6 63.8,4.371 45.652,4.371 45.423,4.6 45.423,9.671 41.529,9.671 41.529,4.6 41.3,4.371 34.329,4.371
3V3 on Signal Layer 2 "3V3" (solid, shelved, pour order 25): 19.071,5.4 19.3,5.171 23.1,5.171 23.329,5.4 23.329,6.271 40.1,6.271 40.329,6.5 40.329,33.671 65.906,33.671 66.135,33.9 66.135,34.271 67.971,34.271 67.971,33.9 68.2,33.671 71.971,33.671 71.971,24.35 72.2,24.121 75.2,24.121 75.429,24.35 75.429,25.222 77.971,25.222 77.971,24.4 78.2,24.171 100.771,24.171 100.771,22.3 101,22.071 111.583,22.071 111.7,22.039 116.385,22.039 118.4,20 118.4,0 67.729,0 67.729,26.571 70.2,26.571 70.429,26.8 70.429,30.7 70.2,30.929 49.729,30.929 49.729,32.5 49.5,32.729 46.7,32.729 46.471,32.5 46.471,29.1 46.7,28.871 63.571,28.871 63.571,4.829 45.88,4.829 45.88,9.9 45.652,10.129 41.3,10.129 41.071,9.9 41.071,4.829 34.1,4.829 33.871,4.6 33.871,0 18.1,0 18.1,38.1 111.3,38.1 111.3,24.829 102.829,24.829 102.829,27.2 102.6,27.429 95.9,27.429 95.671,27.2 95.671,26.229 93.229,26.229 93.229,27.2 93,27.429 74.129,27.429 74.129,35.3 73.9,35.529 37.586,35.529 37.357,35.3 37.357,20.929 29.3,20.929 29.071,20.7 29.071,17.2 29.3,16.971 37.271,16.971 37.271,8.083 19.3,8.083 19.071,7.854
GND on Top Layer "NONET_L01_P023" (solid, shelved, pour order 23): 18.1,37.6 113.8,37.6 113.8,24 118,19.8 118,0.1 18.1,0

## Other copper
Signal Layer 2:
  pour cut-out: 34.1,0.2
  pour cut-out: 40.5,0
  pour cut-out: 37.9,0

## Silkscreen, mask and mechanical layers (free items; w line width, h text height)
Top Overlay:
  lines w0.254: 94.3,0.23 94.3,7.7 ; 96.9,0.23 91.2,0.23 91.2,7.7 96.9,7.7
  text "LCD-CTRL / v1.0 August 2018 / Fred Vatnsdal" at 70.4,0.6 h1
  text "3V3  10 / GND  9 / 1    8 / 2    7 / 3    6 / 4    5" at 91.5,0.4 h0.75
Bottom Overlay:
  lines w0.254: 105.4,0.3 105.4,37.4 ; 115.1,14.649 115.1,19.87 117.3,19.87 117.3,14.751
Mechanical 6:
  lines w0.2: 18.1,0 118.4,0 118.4,20.1 114.2,24.3 114.2,38.1 18.1,38.1 18.1,0
Mechanical 7:
  lines w0.254: 18.1,0 118.4,0 118.4,20.1 114.2,24.3 114.2,38.1 18.1,38.1 18.1,0

## Text inside footprints (layer, text, board x,y; h text height)
J1: Mechanical 1 "PCB EDGE" at 113.8,21.4 h0.3 r90
U6: Mechanical 13 "*" at 29.798,21.79 h1.27